# EAGLE board lm7171_nonInverter_v6 (EAGLE 9.7.0)
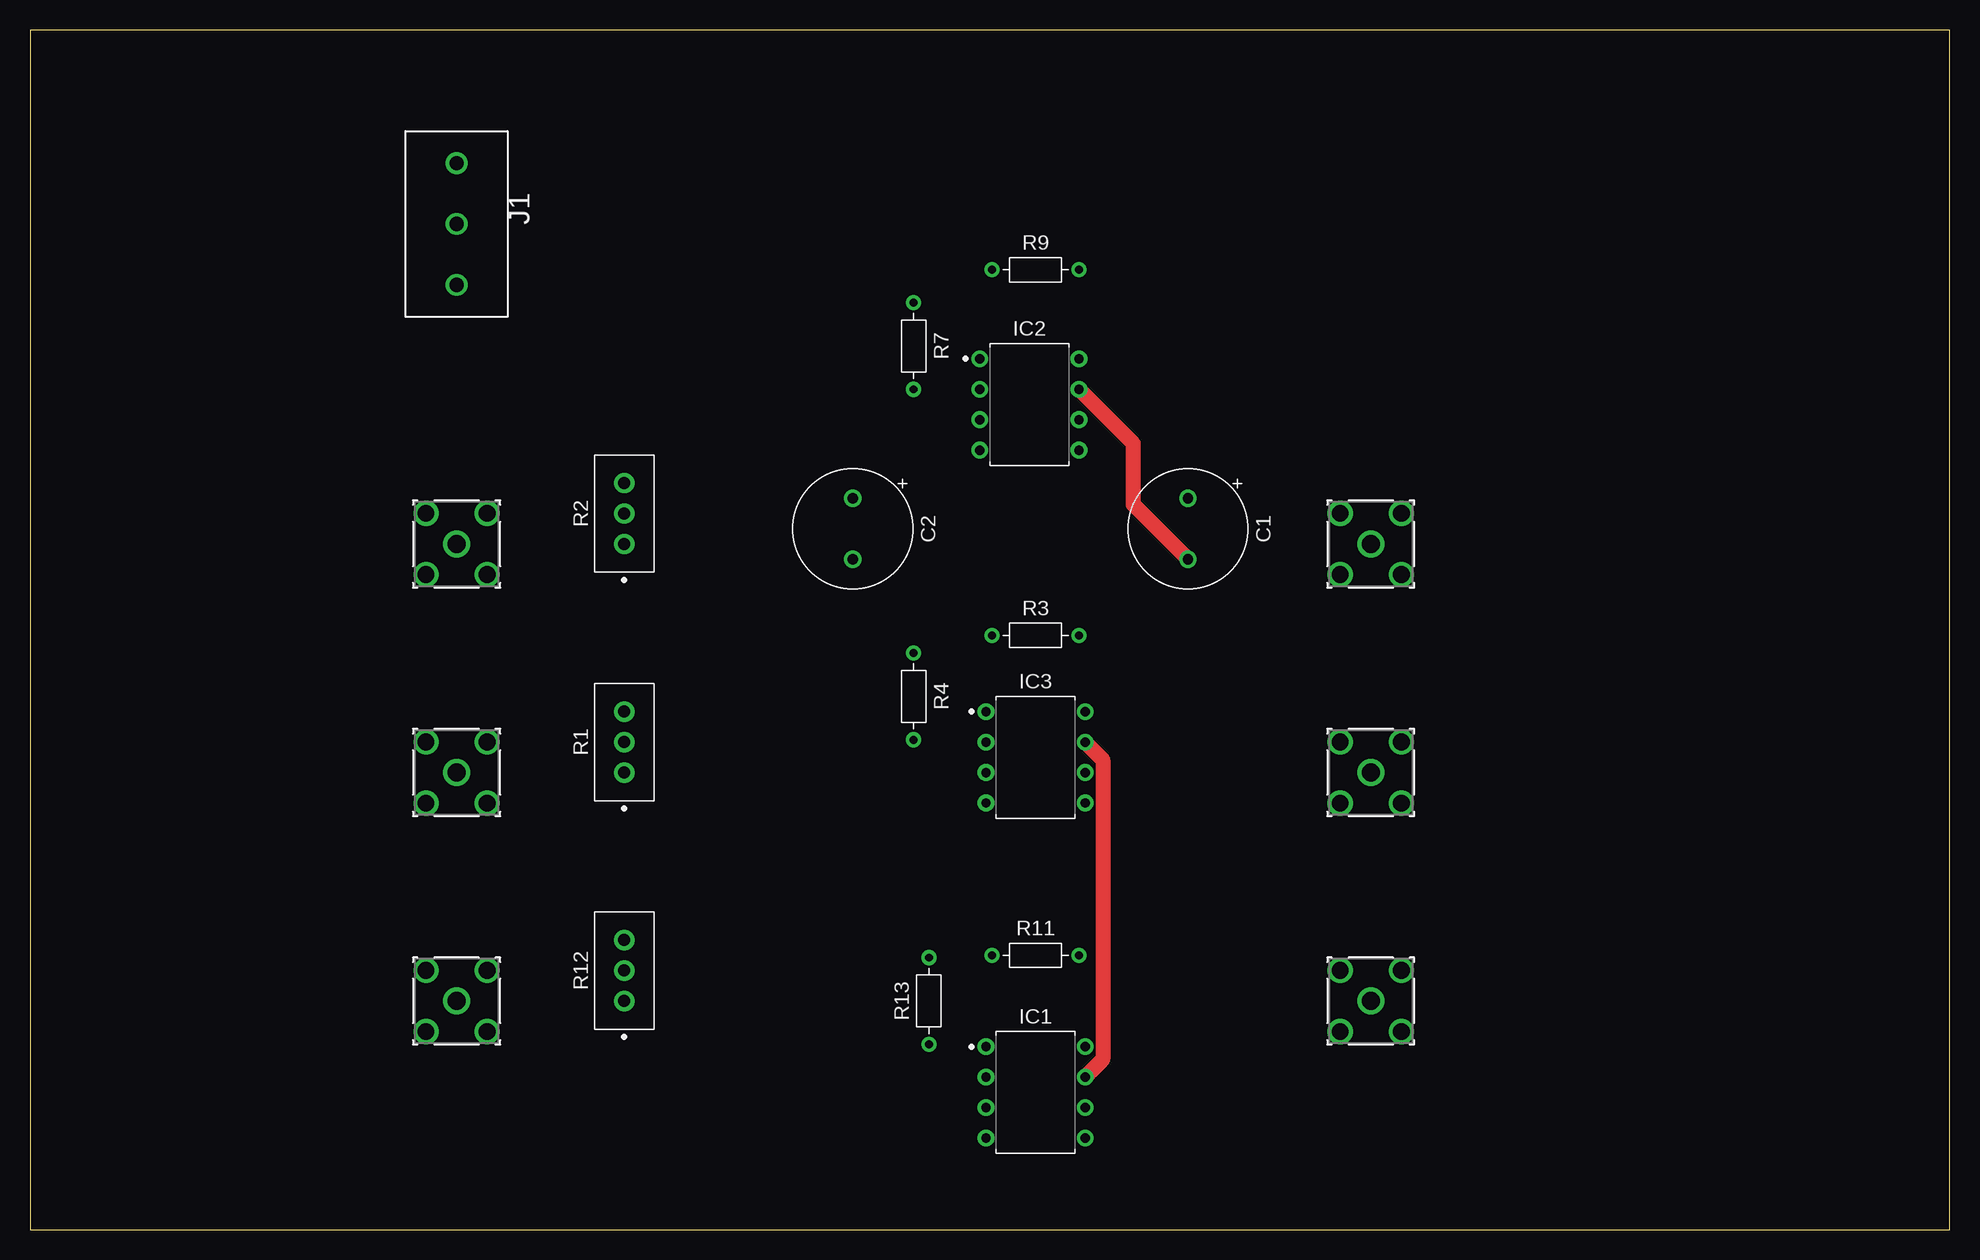
[diagram p0: board, top side]
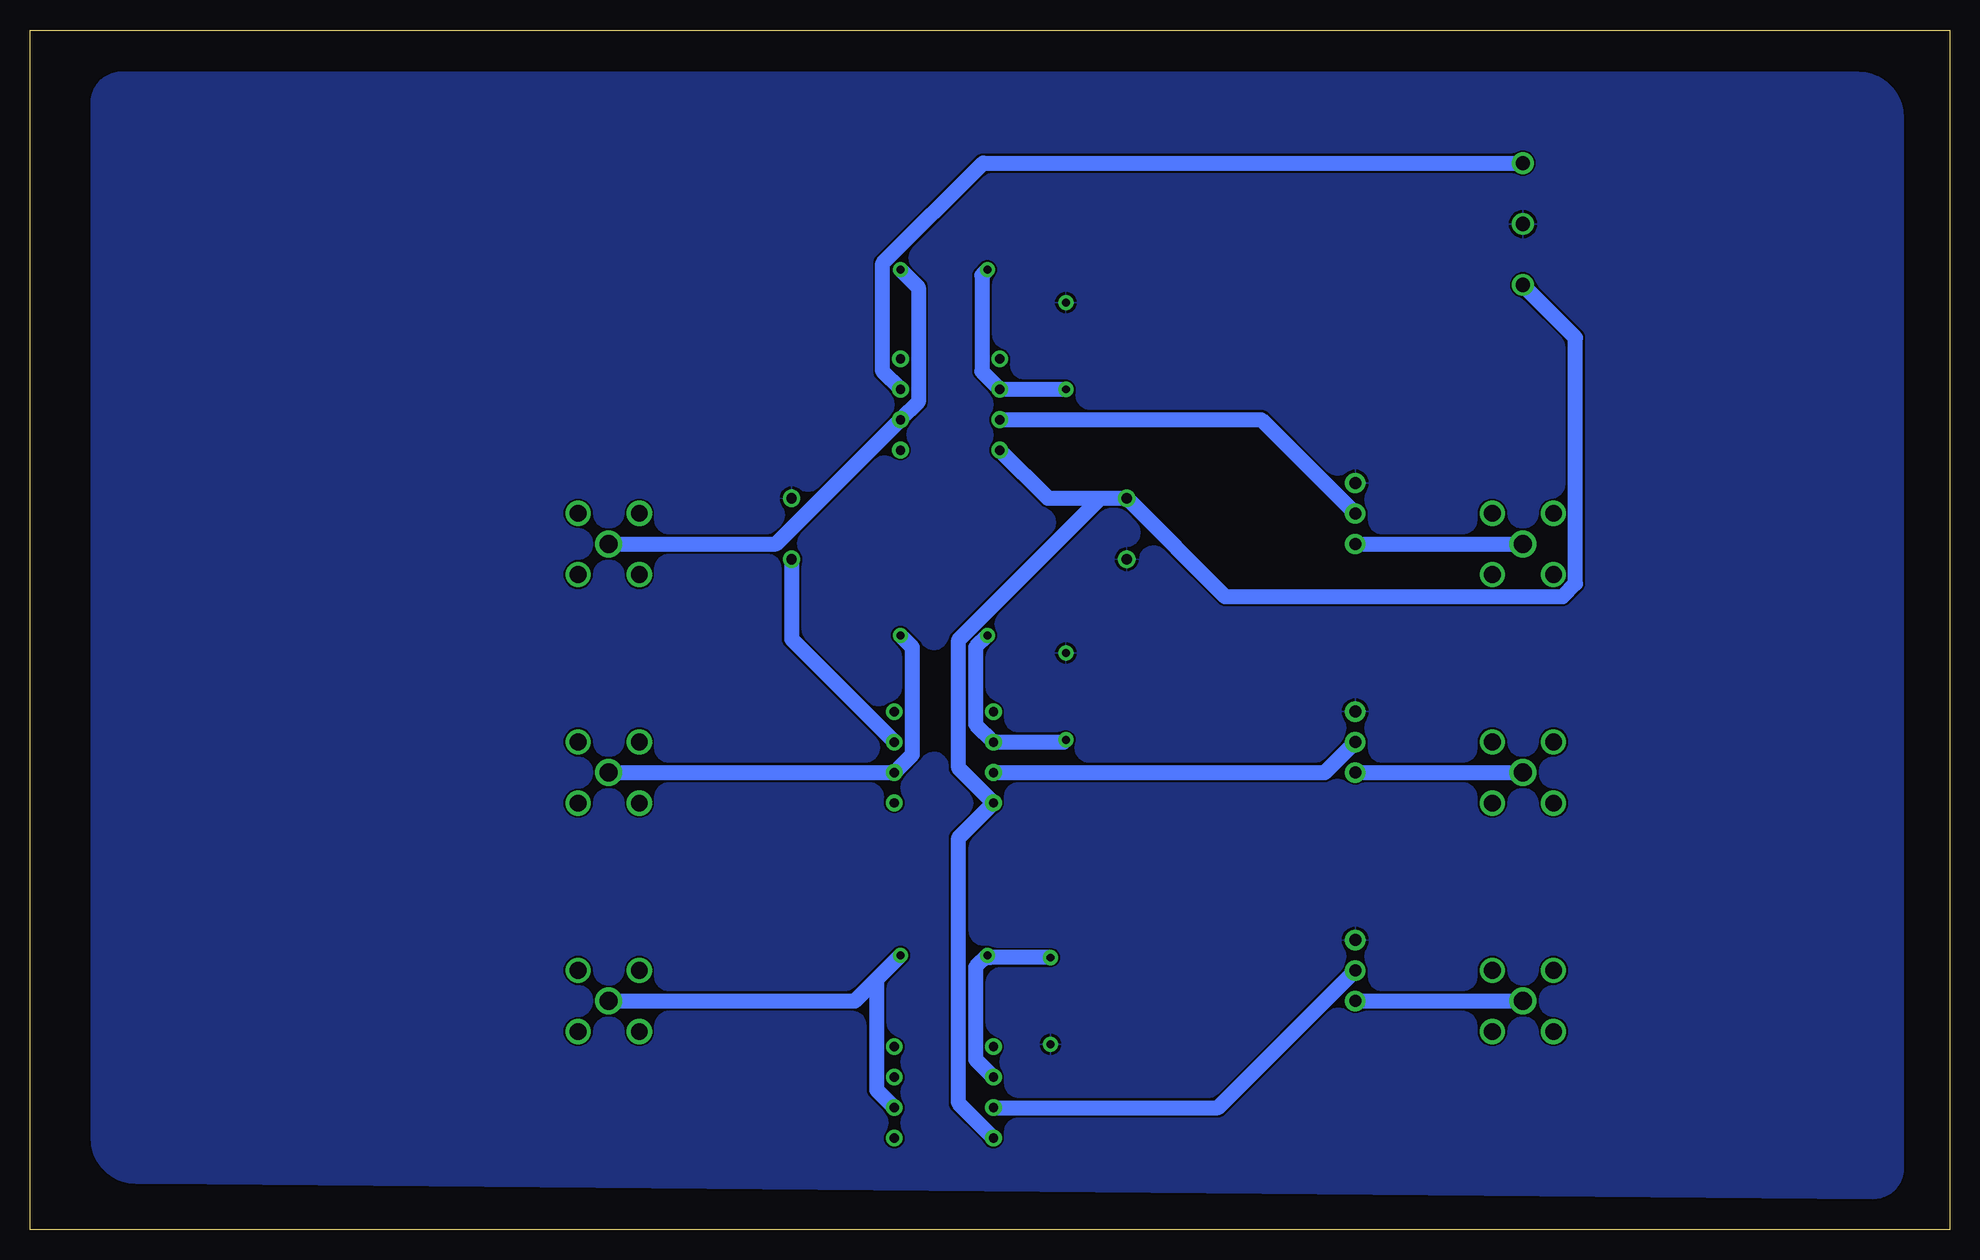
[diagram p1: board, bottom side, seen from below]

Size 160 x 100 mm. Coordinates in mm from the lower left corner, seen from the top.
Outline: 0,0 160,0 160,100 0,100 0,0
Copper layers (1*16): Top / Bottom
Stack-up Default Layer Stack: Top User Defined 0.035mm / Dielectric-1 User Defined 1.5mm / Bottom User Defined 0.035mm
Design rules "default": minimum track width 6mil, minimum drill 0.35mm, track to track 6mil, track to pad 6mil, pad to pad 6mil, via to via 6mil, smd to smd 6mil, copper to edge 40mil, drill to drill 6mil, minimum pad ring 10mil, minimum via ring 8mil, stop-mask expansion 4mil, vias tented up to drill 0mil, thermal gap 10mil

## Footprints (pad centres in the part's own frame; a part is rotated, then mirrored left to right if it is on the bottom)
CAPPRD508W65D1000H1100B = drill 0.85 pad 1.45: 1 -2.54,0; 2 2.54,0
DIP826W53P254L959H508Q8B = drill 0.786 pad 1.386: 1 -4.13,3.81; 2 -4.13,1.27; 3 -4.13,-1.27; 4 -4.13,-3.81; 5 4.13,-3.81; 6 4.13,-1.27; 7 4.13,1.27; 8 4.13,3.81
TERMBLK_508-3N = drill 1.2: 1 0,0; 2 5.08,0; 3 10.16,0
CONN_RF2-04A-T-00-50-G_ADM = drill 1.499 pad 2.007: 1 0,0 | drill 1.397 pad 1.905: 2 -2.553,2.553; 3 -2.553,-2.553; 4 2.553,-2.553; 5 2.553,2.553
PV36W = drill 1 pad 1.7: 1 0,0; 2 2.54,0; 3 5.08,0
RESAD724W46L381D178B = drill 0.66 pad 1.26: 1 -3.62,0; 2 3.62,0

## Placement (x,y rotation side)
C1  [CAPPRD508W65D1000H1100B]  96.52,58.42 270 top
C2  [CAPPRD508W65D1000H1100B]  68.58,58.42 270 top
IC1  LT1167_DIP  [DIP826W53P254L959H508Q8B]  83.82,11.43 0 top
IC2  LT1167_DIP  [DIP826W53P254L959H508Q8B]  83.31,68.79 0 top
IC3  LT1167_DIP  [DIP826W53P254L959H508Q8B]  83.82,39.37 0 top
J1  2828XX-3282837-3  [TERMBLK_508-3N]  35.56,78.74 90 top
J2  RF2-04A-T-00-50-GCONN_RF2-04A-T-00-50-G_ADM  [CONN_RF2-04A-T-00-50-G_ADM]  35.56,38.1 0 top
J3  RF2-04A-T-00-50-GCONN_RF2-04A-T-00-50-G_ADM  [CONN_RF2-04A-T-00-50-G_ADM]  111.76,38.1 0 top
J4  RF2-04A-T-00-50-GCONN_RF2-04A-T-00-50-G_ADM  [CONN_RF2-04A-T-00-50-G_ADM]  35.56,57.15 0 top
J5  RF2-04A-T-00-50-GCONN_RF2-04A-T-00-50-G_ADM  [CONN_RF2-04A-T-00-50-G_ADM]  111.76,57.15 0 top
J6  RF2-04A-T-00-50-GCONN_RF2-04A-T-00-50-G_ADM  [CONN_RF2-04A-T-00-50-G_ADM]  35.56,19.05 0 top
J7  RF2-04A-T-00-50-GCONN_RF2-04A-T-00-50-G_ADM  [CONN_RF2-04A-T-00-50-G_ADM]  111.76,19.05 0 top
R1  [PV36W]  49.53,38.1 90 top
R2  [PV36W]  49.53,57.15 90 top
R3  [RESAD724W46L381D178B]  83.82,49.53 0 top
R4  [RESAD724W46L381D178B]  73.66,44.45 270 top
R7  [RESAD724W46L381D178B]  73.66,73.66 270 top
R9  [RESAD724W46L381D178B]  83.82,80.01 0 top
R11  [RESAD724W46L381D178B]  83.82,22.86 0 top
R12  [PV36W]  49.53,19.05 90 top
R13  [RESAD724W46L381D178B]  74.93,19.05 90 top

## Library data of the parts
C1 C2 = Capacitor; CATEGORY: Capacitor
IC1-IC3 = IC_Linear; CATEGORY: Amplifier; DESCRIPTION: Precision Instrumentation Amplifier; MANUFACTURER: Analog Devices; MPN: Generic; SERIES: LT1167; SUB-CATEGORY: Instrumentation
J1 = Connector; CATEGORY: Connector; DESCRIPTION: TERM BLK 3P SIDE ENT 5.08mm PCB; MANUFACTURER: TE Connectivity; MPN: 282837-3; OPERATING_TEMPERATURE: -40°C to +105°C; PART_STATUS: Active; PITCH: 0.200" (5.08mm); ROHS_COMPLIANCE: RoHS Compliant; SERIES: Buchanan; SUBCATEGORY: Terminal Block; TYPE: Side Wire Entry
J2-J7 = sma_connector; COPYRIGHT: Copyright (C) 2023 Ultra Librarian. All rights reserved.; MANUFACTURER_PART_NUMBER: RF2-04A-T-00-50-G; MFR_NAME: ADAM TECHNOLOGIES INC
R1 R2 R12 = Resistor; CATEGORY: Resistor; DESCRIPTION: Lead Sealed Type Multiturn PV36 Series; MANUFACTURER: BOURNS; MPN: PV36W; OPERATING_TEMPERATURE: -55 to +125 °C; PART_STATUS: Active; ROHS_COMPLIANCE: RoHS Compliant; SERIES: PV36; SUB-CATEGORY: Trimpot; TYPE: Lead Sealed
R3 R4 R7 R9 R11 R13 = Tutorial - Fusion 360; CATEGORY: Resistor; SUB-CATEGORY: Fixed

## Nets
GND: C1.1 C2.2 J1.2 R1.3 R2.3 R4.1 R7.1 R12.3 R13.1
N$3: J2.1 R1.1
N$5: IC3.3 R1.2
N$6: IC3.2 R3.1 R4.2
N$7: IC3.6 J3.1 R3.2
N$11: J4.1 R2.1
N$12: IC2.3 R2.2
N$13: IC2.2 R7.2 R9.1
N$14: IC2.6 J5.1 R9.2
N$15: C2.1 IC1.4 IC2.4 IC3.4 J1.1
N$16: C1.2 IC1.7 IC2.7 IC3.7 J1.3
N$19: J6.1 R12.1
N$20: IC1.3 R12.2
N$21: IC1.2 R11.1 R13.2
N$22: IC1.6 J7.1 R11.2

## Tracks (layer width: path | path; a pad name or v marks a point on that pad's centre or on a via)
GND
  pour Bottom: 149.86,3.81 151.13,3.81 arc90 154.94,7.62 154.94,93.98 arc90 152.4,96.52 7.62,96.52 arc90 3.81,92.71 3.81,5.08 arc90 6.35,2.54
N$3
  Bottom 1.27: R1.1 J2.1
N$5
  Bottom 1.27: IC3.3 52.07,38.1 R1.2
N$6
  Bottom 1.27: R3.1 81.17,48.56 81.17,42.12 IC3.2 73.85,40.64 R4.2
N$7
  Bottom 1.27: J3.1 IC3.6 86.47,39.58 86.47,48.56 R3.2
N$11
  Bottom 1.27: R2.1 J4.1
N$12
  Bottom 1.27: IC2.3 57.35,67.52 R2.2
N$13
  Bottom 1.27: R9.1 80.66,79.55 80.66,71.54 IC2.2 73.67,70.06 R7.2
N$14
  Bottom 1.27: J5.1 97.8,57.15 IC2.6 85.96,69 85.96,78.53 R9.2
N$15
  Bottom 1.27: C2.1 60.38,52.76 32.25,52.76 31.17,53.84 31.17,74.35 J1.1 | IC2.4 75.16,60.96 C2.1 | C2.1 70.78,60.96 82.59,49.15 82.59,38.46 IC3.4 82.59,32.66 82.59,10.52 IC1.4
N$16
  Top 1.27: C1.2 91.97,60.43 91.97,65.53 IC2.7 | IC3.7 89.43,39.16 89.43,14.18 IC1.7
  Bottom 1.27: IC2.7 88.92,71.54 88.92,80.54 80.56,88.9 J1.3 | C1.2 96.52,49.21 IC3.7
N$19
  Bottom 1.27: R12.1 J6.1
N$20
  Bottom 1.27: IC1.3 60.96,10.16 R12.2
N$21
  Bottom 1.27: IC1.2 81.17,14.18 81.17,21.89 R11.1 80.01,22.67 R13.2
N$22
  Bottom 1.27: J7.1 91.25,19.05 R11.2 89.43,20.87 89.43,11.64 IC1.6